# Altium PCB PCB1.PcbDoc
Units mil, origin at the board's own origin, x right, y up, seen from the top; angles counter-clockwise.
Board outline 3915 x 2110 mil, 2 copper layers (Top Layer, Bottom Layer); 24 components, 12 nets, 48 pads, 0 vias.
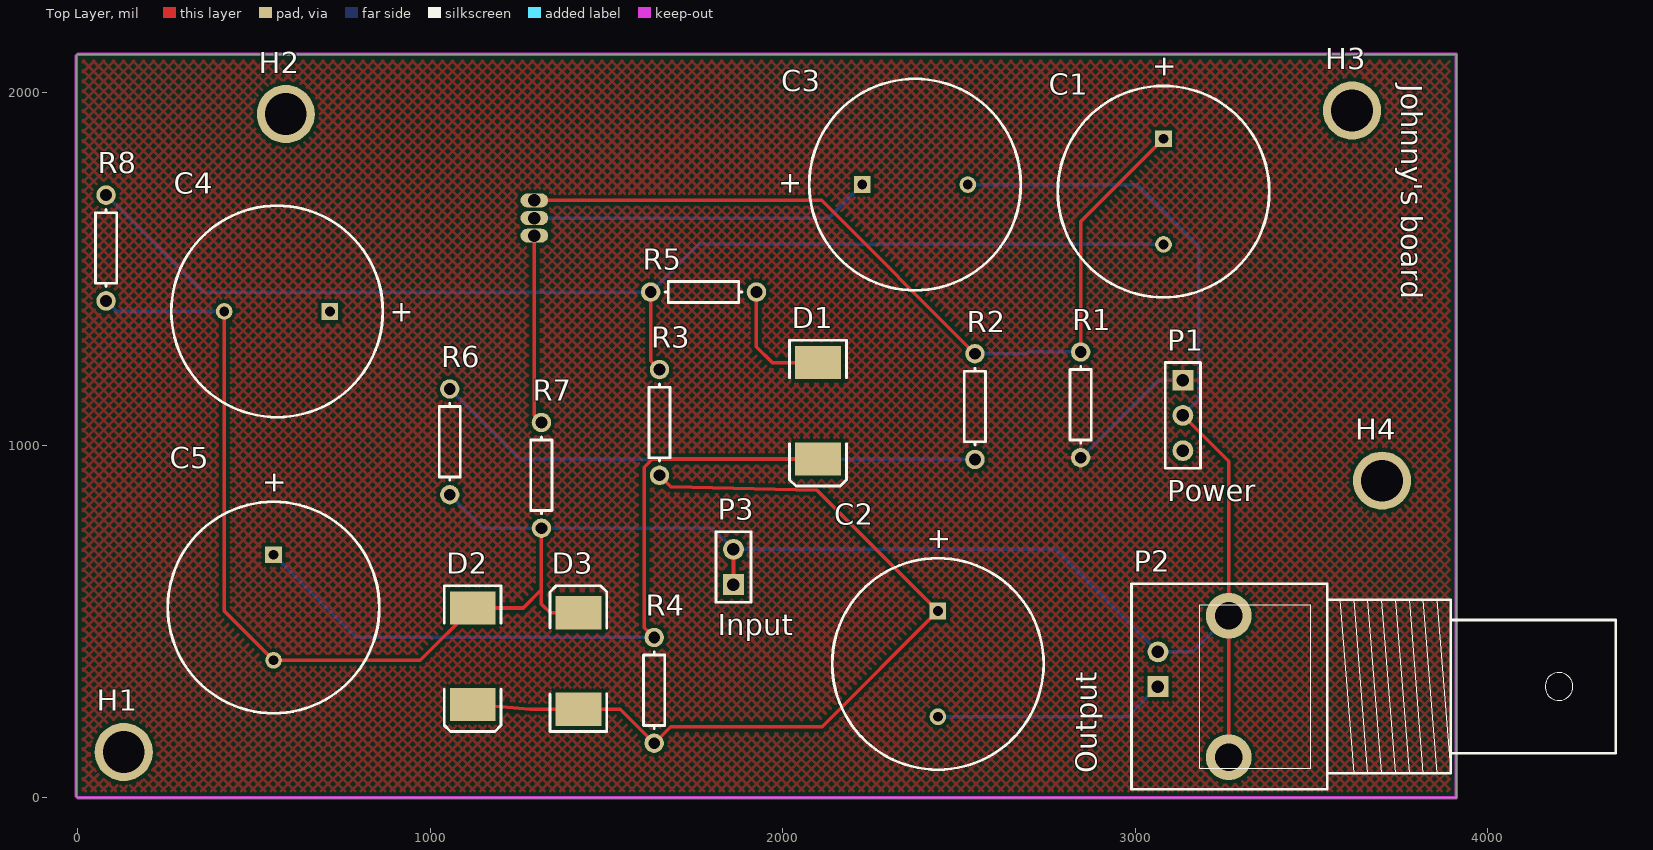
[diagram p0: Top Layer view]
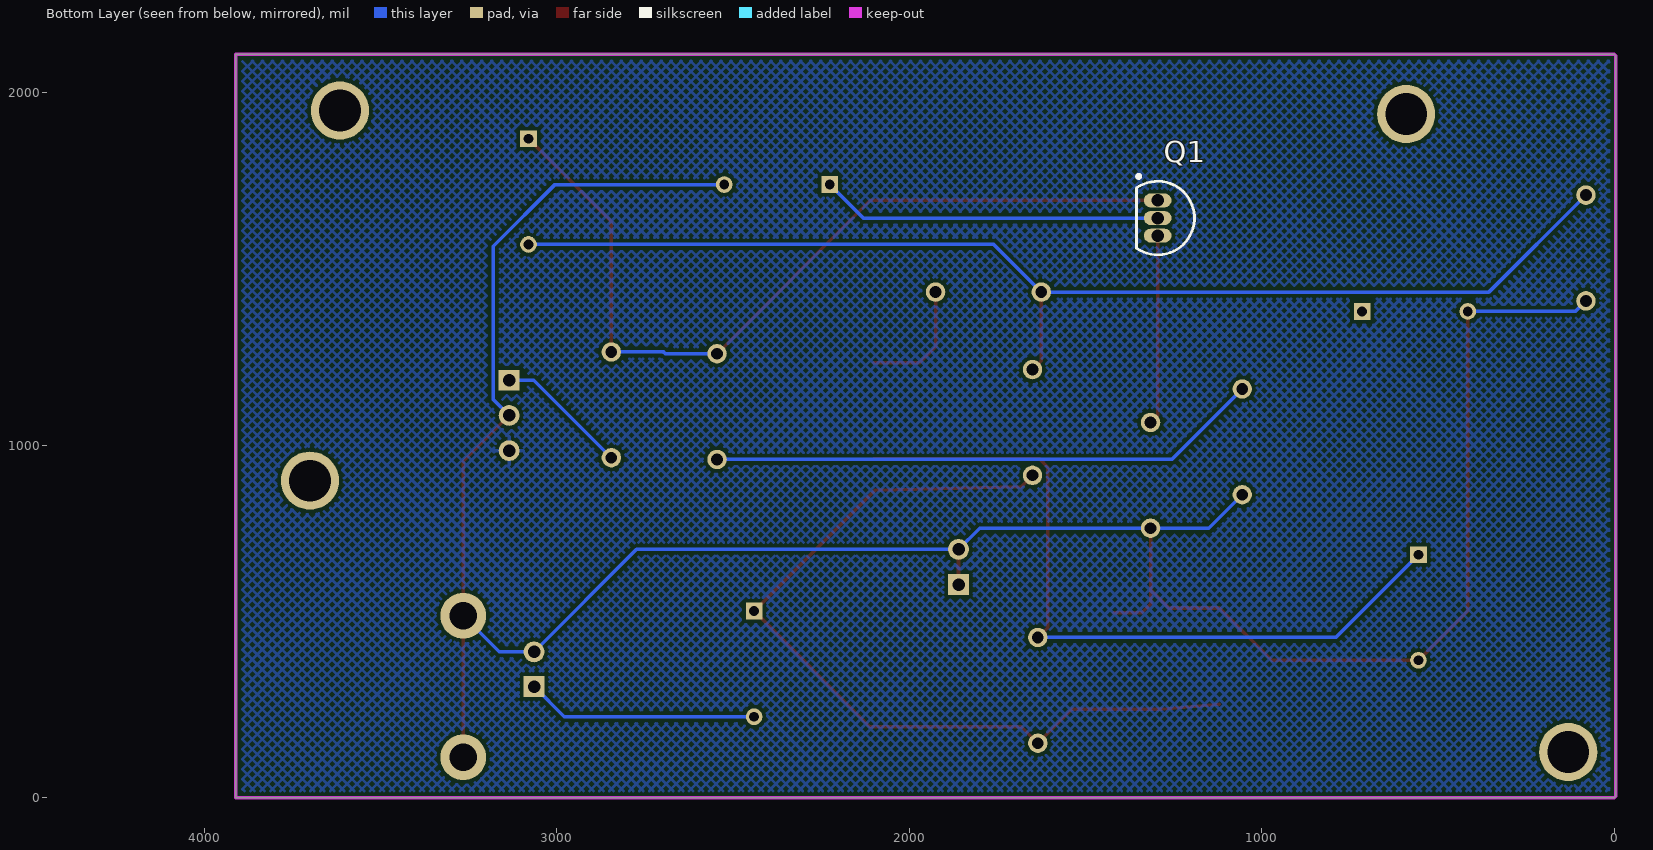
[diagram p1: Bottom Layer view, seen from below]

## Layer stack, top to bottom
Top Solder: solder mask 0.4, Solder Resist, Dk 3.5
Top Layer: signal copper 1.4
Dielectric 1: dielectric 12.6, FR-4, Dk 4.8
Bottom Layer: signal copper 1.4
Bottom Solder: solder mask 0.4, Solder Resist, Dk 3.5

## Board outline
0,0 -5,5 -5,2105 0,2110 3910,2110 3910,0

## Design rules (kind name [scope] priority, off if disabled: settings)
Clearance [All] p1: gap=10 ignorepadtopadclearanceinfootprint=FALSE except(0: Arc-Hole Track-Hole SMDPad-Hole THPad-Hole Via-Hole Fill-Hole Poly-Hole Region-Hole Text-Hole)
PolygonConnect [All] p1: connectstyle=Relief reliefconductorwidth=10 reliefentries=4 polygonreliefangle="90 Angle" airgapwidth=10
RoutingVias [All] p1: holewidth=28 width=50 viastyle="Through Hole" minholewidth=28 minwidth=50 maxholewidth=28 maxwidth=50
SolderMaskExpansion [All] p1: expansion=4 istentingtop=FALSE
Width [All] p1: maxlimit=10 minlimit=10 preferedwidth=10
30 further rules are at their usual default settings.

## Components (designator, comment, footprint, x,y, rotation, side; value= is the part's Value field where it differs from the comment)
C1 "Cap Pol1" RB7.6-15 3080,1720 r90 top value=50
C2 "Cap Pol1" RB7.6-15 2440,380 r90 top value=50
C3 "Cap Pol1" RB7.6-15 2375,1740 r180 top value=50
C4 "Cap Pol1" RB7.6-15 565,1380 r0 top value=50
C5 "Cap Pol1" RB7.6-15 555,540 r90 top value=50
D1 "Diode" SMC 2100,1098.19 r270 top
D2 "Diode" SMC 1120,401.81 r270 top
D3 "Diode" SMC 1420,388.19 r90 top
H1 "Hole 3mm" "Hole 3mm" 130,130 r0 top
H2 "Hole 3mm" "Hole 3mm" 590,1940 r0 top
H3 "Hole 3mm" "Hole 3mm" 3615,1950 r0 top
H4 "Hole 3mm" "Hole 3mm" 3700,900 r0 top
P1 "Power" HDR1X3 3135,1185 r270 top
P2 "Output" "BNC_RA CON" 3064.21,315.79 r180 top
P3 "Input" HDR1X2 1860,605 r90 top
Q1 "NPN" TO-226-AA 1295,1645 r0 bottom
R1 "Res1" AXIAL-0.3 2845,1115 r270 top value=10K
R2 "Res1" AXIAL-0.3 2545,1110 r90 top value=68K
R3 "Res1" AXIAL-0.3 1650,1065 r90 top value=390K
R4 "Res1" AXIAL-0.3 1635,305 r90 top value=39K
R5 "Res1" AXIAL-0.3 1775,1435 r180 top value=390
R6 "Res1" AXIAL-0.3 1055,1010 r90 top value=10K
R7 "Res1" AXIAL-0.3 1315,915 r90 top value=1K
R8 "Res1" AXIAL-0.3 80,1560 r90 top value=4.7K

## Footprints (in the part's own frame and the unit in brackets; to place one, negate y for a bottom-side part, rotate by r counter-clockwise, add the part's x,y. Pads: shape width x height; smd on the part's side, far side on the other; paste and mask are expansions set on the pad)
AXIAL-0.3 [mm] "Axial Device, Thru-Hole; 2 Leads; 0.3 in Pin Spacing"
  round 1.4 hole 0.85: 1(-3.81,0) 2(3.81,0)
  silkscreen extent -2.77,-0.76 2.77,0.76
"BNC_RA CON" [mm] "Connector; BNC Elbow"
  rect 1.5x1.5 hole 0.9: 1(0,0)
  round 3.3 hole 2: 2(-5.1,5.1) 2(-5.1,-5.1)
  round 1.5 hole 0.9: 2(0,-2.5)
  silkscreen extent -33,-7.4 1.9,7.4
HDR1X2 [mm] "Connector; Header; 2 Position"
  rect 1.5x1.5 hole 0.9: 1(0,0)
  round 1.5 hole 0.9: 2(2.54,0)
  silkscreen extent -1.27,-1.27 3.81,1.27
HDR1X3 [mm] "Connector; Header; 3 Position"
  rect 1.5x1.5 hole 0.9: 1(0,0)
  round 1.5 hole 0.9: 2(2.54,0) 3(5.08,0)
  silkscreen extent -1.27,-1.27 6.35,1.27
"Hole 3mm" [mil]
  round 165 hole 118.11: 1(0,0)
RB7.6-15 [mm] "Polarized Capacitor (Radial); 2 Leads"
  rect 1.2x1.2 hole 0.7: 1(3.81,0)
  round 1.2 hole 0.7: 2(-3.81,0)
  silkscreen extent -7.62,-7.62 7.62,7.62
SMC [mm] "DO-214-AB/SMC; 2 C-Bend Leads; Body 7.9 x 5.9 mm, inc. leads (LxW)"
  rect 2.4x3.3 smd: 1(-3.475,0) 2(3.475,0)
  silkscreen extent -5.07,-2.05 5.43,2.06
TO-226-AA [mm] "TO, Flat Index; 3 In-Line, Axial Leads; Body Dia. 4.8mm; Leads 0.55 x 0.51 mm (max)"
  oval 2x1 hole 0.9: 1(0,-1.27) 2(0,0) 3(0,1.27)
  silkscreen extent -2.65,-3.13 1.52,2.65, body extent -2.65,-2.66 1.52,2.66, height 5.33

## Part data
C1 C2 C3 C4 C5: "Polarized Capacitor (Radial)", LatestRevisionDate=17-Jul-2002, LatestRevisionNote="Re-released for DXP Platform.", PackageDescription="Polarized Capacitor (Radial); 2 Leads", PackageReference=RB7.6-15, Published=8-Jun-2000, Publisher="Altium Limited"
D1 D2 D3: "Default Diode", Code_JEDEC=DO-214-AB, LatestRevisionDate=17-Jul-2002, LatestRevisionNote="Re-released for DXP Platform.", PackageDescription="DO-214-AB/SMC; 2 C-Bend Leads; Body 7.9 x 5.9 mm, inc. leads (LxW)", PackageReference=SMC, PackageVersion=Sep-1996, Published=8-Jun-2000, Publisher="Altium Limited"
P1: library part "Header 3", "Header, 3-Pin", LatestRevisionDate=17-Jul-2002, LatestRevisionNote="Re-released for DXP Platform.", Publisher="Altium Limited"
P2: library part BNC, "BNC Elbow Connector", LatestRevisionDate=17-Jul-2002, LatestRevisionNote="Re-released for DXP Platform.", Publisher="Altium Limited"
P3: library part "Header 2", "Header, 2-Pin", LatestRevisionDate=17-Jul-2002, LatestRevisionNote="Re-released for DXP Platform.", Publisher="Altium Limited"
Q1: "NPN Bipolar Transistor", Code_JEDEC=TO-226-AA, LatestRevisionDate=17-Jul-2002, LatestRevisionNote="Re-released for DXP Platform.", PackageDescription="TO, Flat Index; 3 In-Line, Axial Leads; Body Dia. 4.8mm; Leads 0.55 x 0.51 mm (max)", PackageReference=TO-226-AA, Published=8-Jun-2000, Publisher="Altium Limited"
R1 R2 R3 R4 R5 R6 R7 R8: "Resistor", LatestRevisionDate=17-Jul-2002, LatestRevisionNote="Re-released for DXP Platform.", PackageDescription="Axial Device, Thru-Hole; 2 Leads; 0.3 in Pin Spacing", PackageReference=AXIAL-0.3, Published=8-Jun-2000, Publisher="Altium Limited"

## Nets (pads, with @x,y where several pads share a name; then routed paths per layer and width w, separated by ;. In a path a pad name is that pad's centre, name@x,y a point inside that pad or via, vN(x,y) a via of type N, cw(c..) or ccw(c..) an arc to the next point about the centre after c; other vN are vias at no path point)
+12V: P1.1 R1.2 | length 381.1
  Bottom Layer w10: R1.2 3065,1185 P1.1
-12V: P1.3
INPUT: C3.2 C4.2 C5.2 D2.1 D3.2 P1.2 P2.2 P3.1 P3.2 R6.1 R7.1 R8.1 | length 7355.6
  Top Layer w10: C4.2 415,530 C5.2 971.38,390 D2.1 1263.62,538.62 1315,590 ; R7.1 1315,590 ; D3.2 1340,525 1315,550 1315,590 ; P3.1 P3.2 ; P1.2 3265,955 3265,516.57 P2.2@3265,115
  Bottom Layer w10: R8.1 110,1380 C4.2 ; R6.1 1150,765 R7.1 1800,765 P3.2 2773.42,705 3064.21,414.21 3162.64,414.21 P2.2@3265,516.57 ; C3.2 3005,1740 3180,1565 3180,1130 P1.2
NetC1_1: C1.1 Q1.1 R1.1 R2.2 | length 2434.6
  Top Layer w10: Q1.1 2110,1695 R2.2 ; R1.1 2845,1635 C1.1
  Bottom Layer w10: R2.2 2692,1260 2697,1265 R1.1
NetC1_2: C1.2 R3.2 R5.2 R8.2 | length 3400.2
  Top Layer w10: R5.2 1625,1240 R3.2
  Bottom Layer w10: R8.2 355,1435 R5.2 1760,1570 C1.2
NetC2_1: C2.1 D2.2 D3.1 R3.1 R4.1 | length 2461.3
  Top Layer w10: D2.2 1283.62,251.38 D3.1 1538.62,251.38 R4.1 1682,202 2112,202 C2.1 2097,873 1682,883 R3.1
NetC2_2: C2.2 P2.1 | length 659.7
  Bottom Layer w10: C2.2 2978.42,230 P2.1
NetC3_1: C3.1 Q1.2 | length 969.4
  Bottom Layer w10: Q1.2 2130,1645 C3.1
NetC5_1: C5.1 D1.2 R4.2 | length 2174.8
  Top Layer w10: R4.2 1607,483 1607,938.38 1630,961.38 D1.2
  Bottom Layer w10: C5.1 790,455 R4.2
NetD1_1: D1.1 R5.1 | length 348.6
  Top Layer w10: R5.1 1925,1280 1970,1235 D1.1
NetQ1_3: Q1.3 R7.2 | length 538.3
  Top Layer w10: Q1.3 1295,1085 R7.2
NetR2_1: R2.1 R6.2 | length 1572.8
  Bottom Layer w10: R6.2 1255,960 R2.1
pads on no net: C4.1 H1.1 H2.1 H3.1 H4.1

## Polygon pours and split planes (outlines as drawn)
+12V on Top Layer "+12V_L01_P000" (hatched 45Degree grid 20 track 8, pour order 0): 3910,0 3907.5,2.5 -2.5,2.5 -2.5,2107.5 0,2110 3910,2110
-12V on Bottom Layer "-12V_L02_P001" (hatched 45Degree grid 20 track 8, pour order 1): 3891,19 17.28,19 0,36.28 0,2110 3910,2110

## Keep-outs
Keep-Out Layer:
  lines w10: -5,5 -5,2105 0,2110 3820,2110 3910,2110 3910,0 0,0 -5,5

## Silkscreen, mask and mechanical layers (free items; w line width, h text height)
Top Overlay:
  text "Johnny's board" at 3754.99,2025 h60 r270

## Text inside footprints (layer, text, board x,y; h text height)
C1: Top Overlay "+" at 3109.01,2040.15 h59.06 r90
C2: Top Overlay "+" at 2469.01,700.15 h59.06 r90
C3: Top Overlay "+" at 2054.85,1769.01 h59.06 r180
C4: Top Overlay "+" at 885.15,1350.99 h59.06
C5: Top Overlay "+" at 584.01,860.15 h59.06 r90